# Altium PCB PWR board_PCB.PcbDoc
Units mm, origin at the board's own origin, x right, y up, seen from the top; angles counter-clockwise.
Board outline 85 x 70 mm, 2 copper layers (Top Layer, Bottom Layer); 51 components, 37 nets, 139 pads, 35 vias.
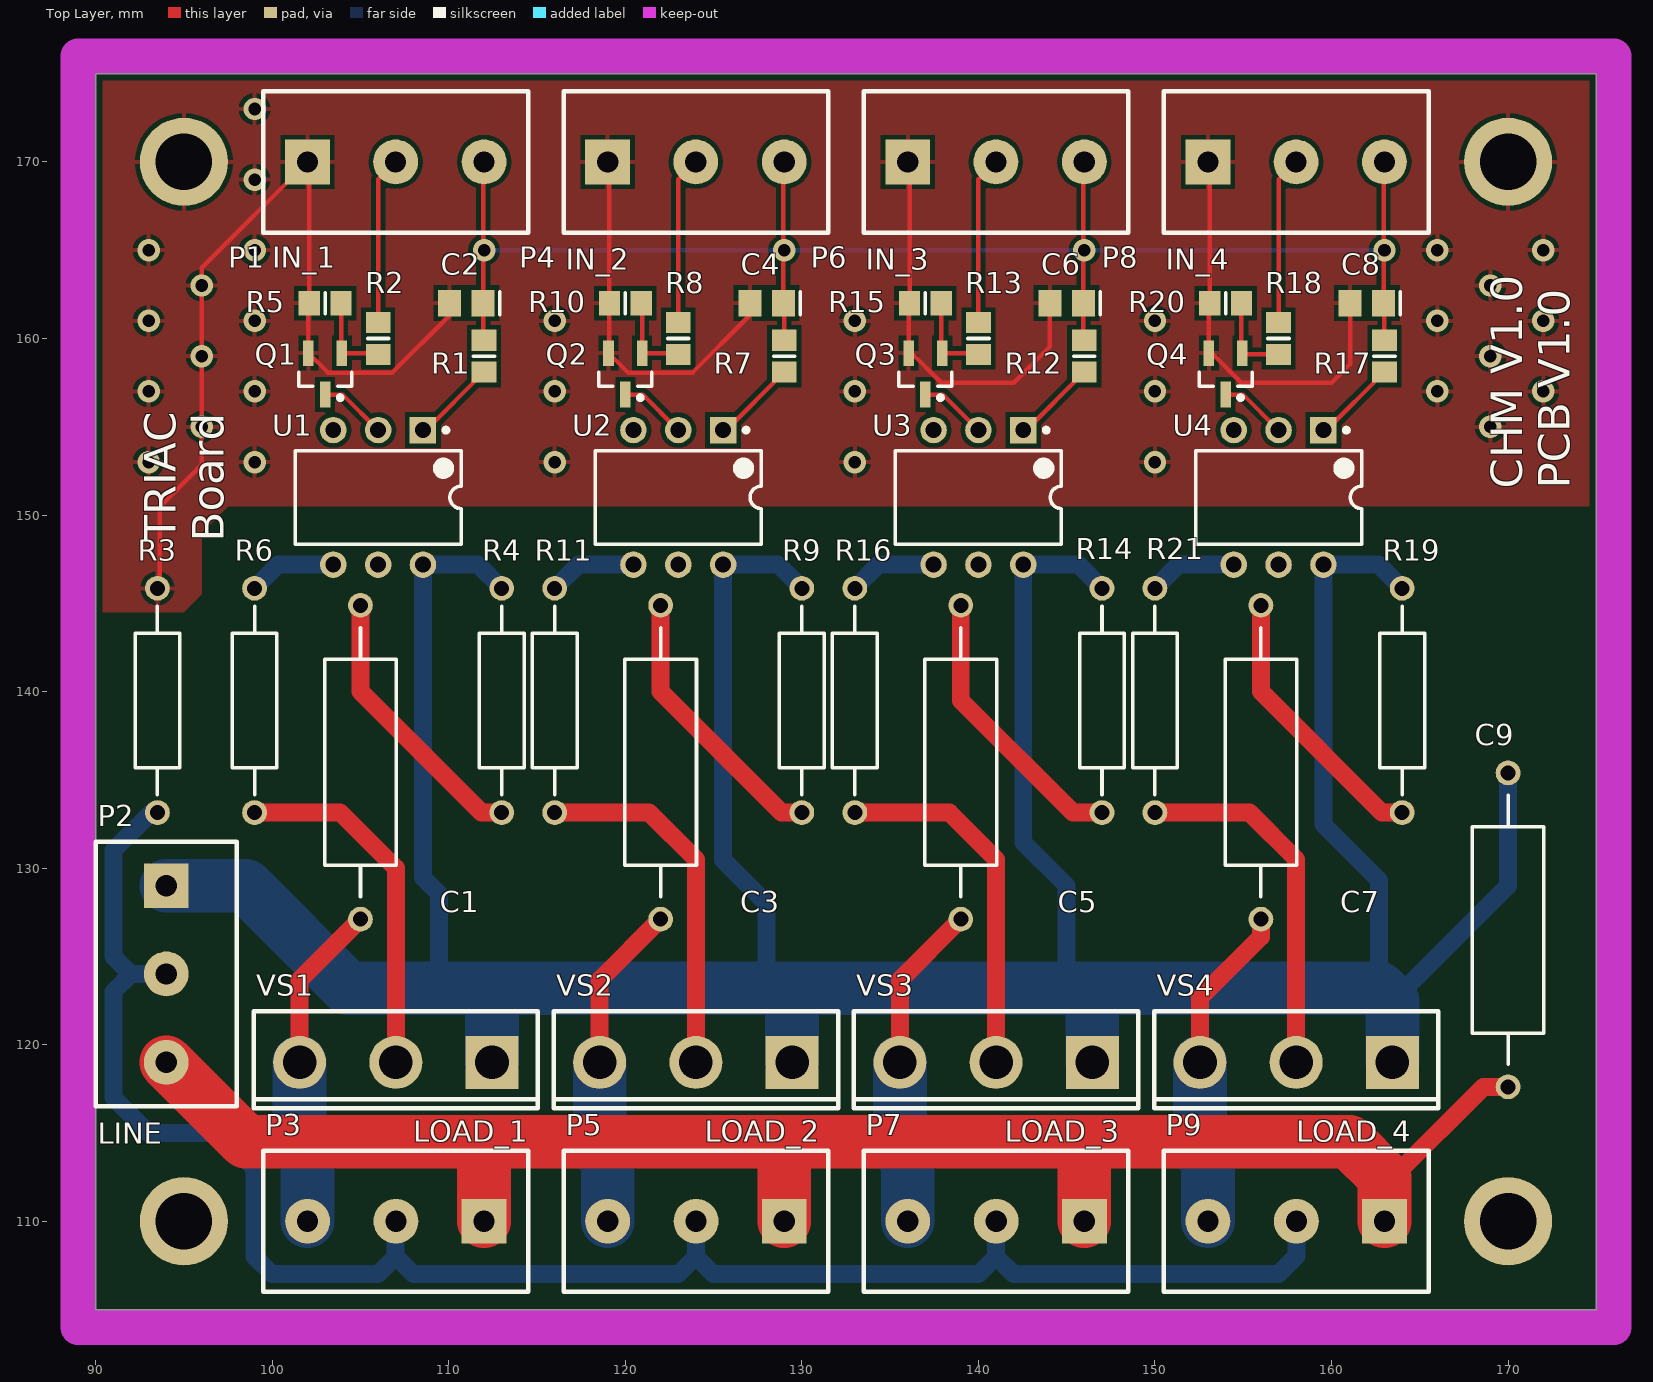
[diagram p0: Top Layer view]
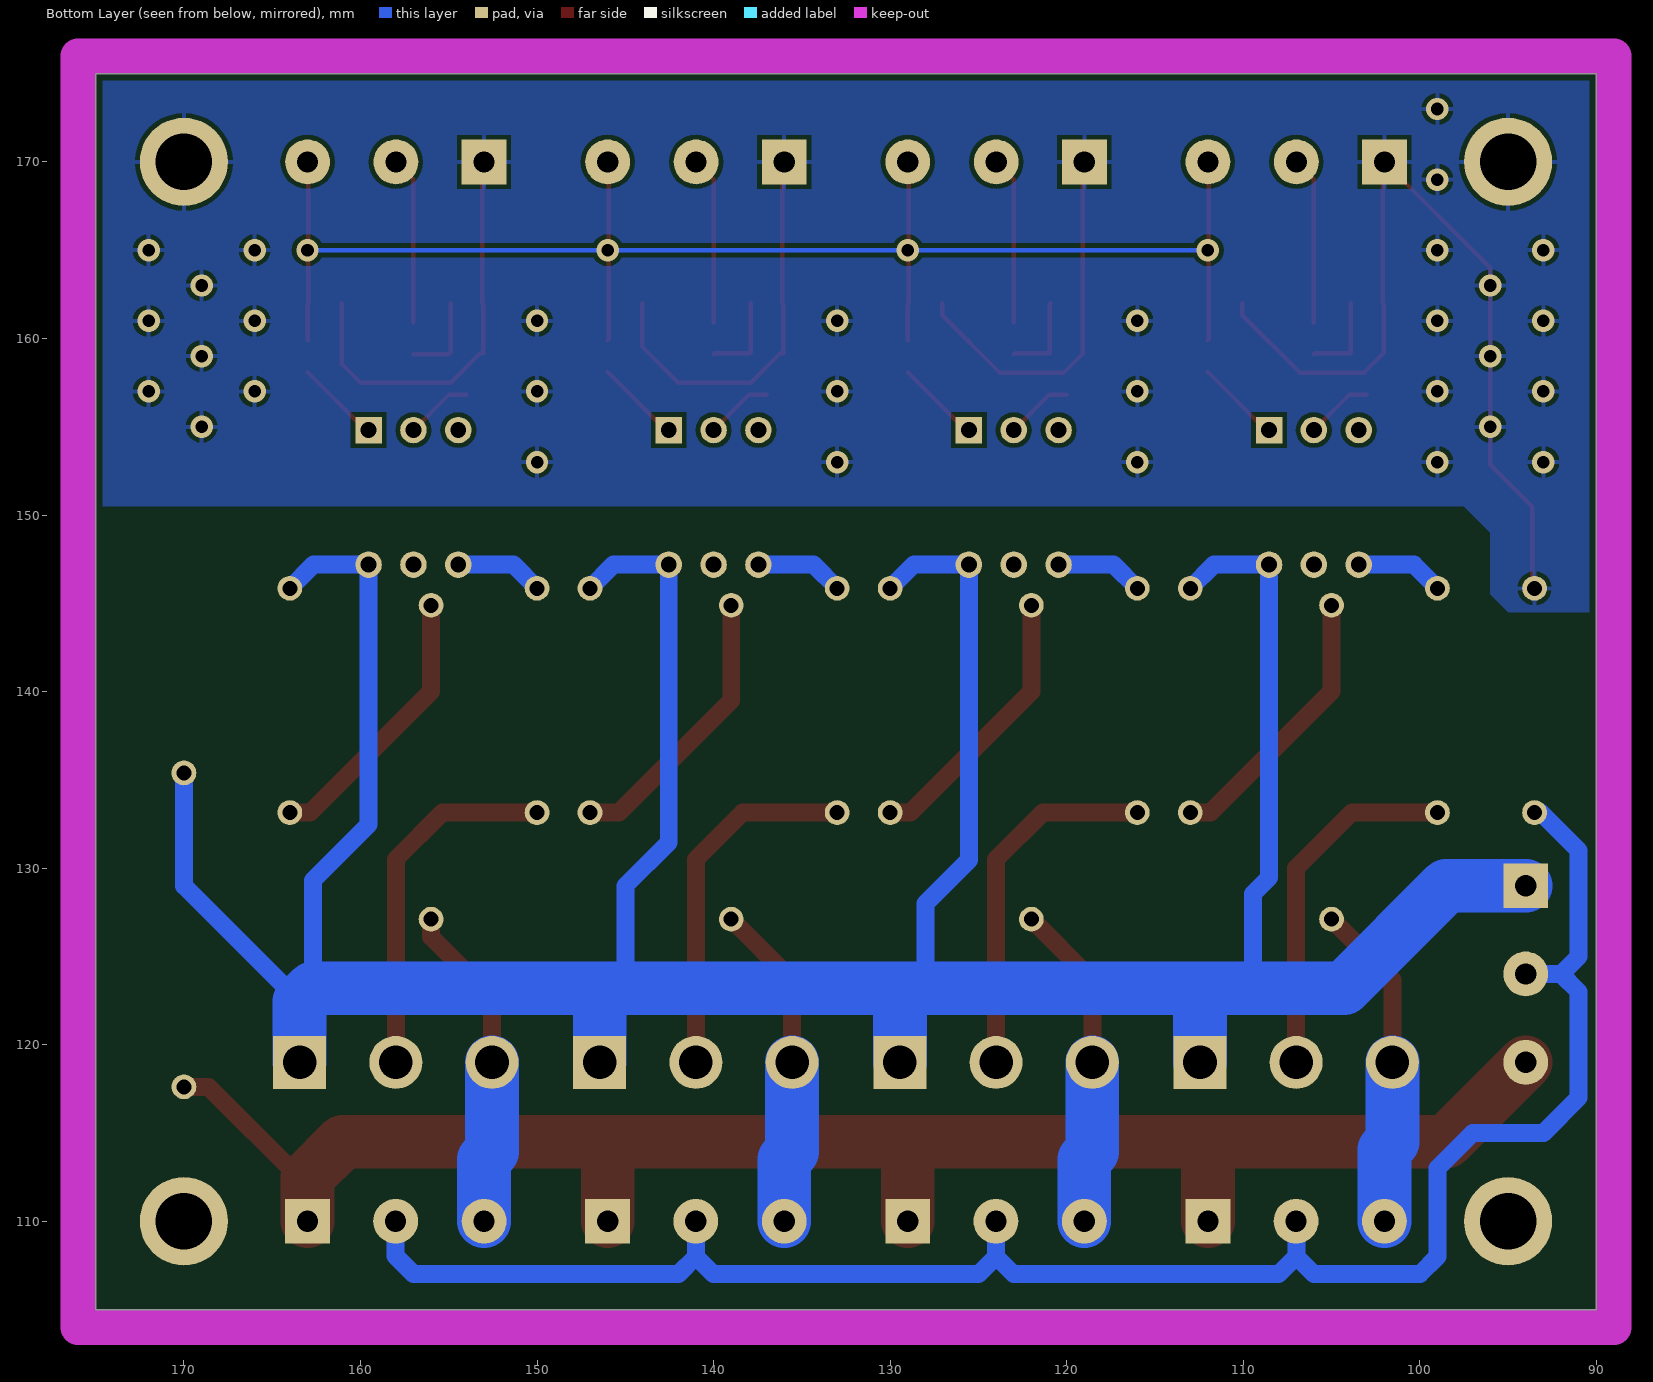
[diagram p1: Bottom Layer view, seen from below]

## Layer stack, top to bottom
Top Solder: solder mask 0.0102, Solder Resist, Dk 3.5
Top Layer: signal copper 0.0356
Dielectric1: dielectric 0.32, FR-4, Dk 4.8
Bottom Layer: signal copper 0.0356
Bottom Solder: solder mask 0.0102, Solder Resist, Dk 3.5

## Board outline
90,105 175,105 175,175 90,175

## Design rules (kind name [scope] priority, off if disabled: settings)
Clearance [All] p1: gap=0.254
PolygonConnect [All] p1: connectstyle=Relief reliefconductorwidth=0.254 reliefentries=4 polygonreliefangle="90 Angle" airgapwidth=0.254
RoutingVias [All] p1: holewidth=0.711 width=1.27 viastyle="Through Hole" minholewidth=0.711 minwidth=1.27 maxholewidth=0.711 maxwidth=1.27
SilkToSolderMaskClearance SilkscreenOverComponentPads [IsPad] p1: minsilkscreentomaskgap=0.254 clearancetoexposedcopper=TRUE
SolderMaskExpansion [All] p1: expansion=0.102
Width "Schematic Width Constraint_18" [InNet('NetC1_1')] p1: maxlimit=5.08 minlimit=1.016 preferedwidth=3.048 minimp=50.000000 maximp=50.000000 favimp=50.000000
Width "Schematic Width Constraint_16" [InNet('NetC3_1')] p2: maxlimit=5.08 minlimit=1.016 preferedwidth=3.048 minimp=50.000000 maximp=50.000000 favimp=50.000000
Width "Schematic Width Constraint_14" [InNet('NetC5_1')] p3: maxlimit=5.08 minlimit=1.016 preferedwidth=3.048 minimp=50.000000 maximp=50.000000 favimp=50.000000
Width "Schematic Width Constraint_12" [InNet('NetC7_1')] p4: maxlimit=5.08 minlimit=1.016 preferedwidth=3.048 minimp=50.000000 maximp=50.000000 favimp=50.000000
Width "Schematic Width Constraint_1" [InNet('AC_2')] p5: maxlimit=5.08 minlimit=1.016 preferedwidth=3.048 minimp=50.000000 maximp=50.000000 favimp=50.000000
Width "Schematic Width Constraint" [InNet('AC_1')] p6: maxlimit=5.08 minlimit=1.016 preferedwidth=3.048 minimp=50.000000 maximp=50.000000 favimp=50.000000
Width "Schematic Width Constraint_15" [InNet('NetC3_2')] p7: maxlimit=1.27 minlimit=0.254 preferedwidth=1.016 bottomlayer_maxwidth=1.016 minimp=50.000000 maximp=50.000000 favimp=50.000000
Width "Schematic Width Constraint_13" [InNet('NetC5_2')] p8: maxlimit=1.27 minlimit=0.254 preferedwidth=1.016 bottomlayer_maxwidth=1.016 minimp=50.000000 maximp=50.000000 favimp=50.000000
Width "Schematic Width Constraint_11" [InNet('NetC7_2')] p9: maxlimit=1.27 minlimit=0.254 preferedwidth=1.016 bottomlayer_maxwidth=1.016 minimp=50.000000 maximp=50.000000 favimp=50.000000
Width "Schematic Width Constraint_8" [InNet('NetR11_1')] p10: maxlimit=1.27 minlimit=0.254 preferedwidth=1.016 bottomlayer_maxwidth=1.016 minimp=50.000000 maximp=50.000000 favimp=50.000000
Width "Schematic Width Constraint_7" [InNet('NetR11_2')] p11: maxlimit=1.27 minlimit=0.254 preferedwidth=1.016 bottomlayer_maxwidth=1.016 minimp=50.000000 maximp=50.000000 favimp=50.000000
Width "Schematic Width Constraint_6" [InNet('NetR16_1')] p12: maxlimit=1.27 minlimit=0.254 preferedwidth=1.016 bottomlayer_maxwidth=1.016 minimp=50.000000 maximp=50.000000 favimp=50.000000
Width "Schematic Width Constraint_5" [InNet('NetR16_2')] p13: maxlimit=1.27 minlimit=0.254 preferedwidth=1.016 bottomlayer_maxwidth=1.016 minimp=50.000000 maximp=50.000000 favimp=50.000000
Width "Schematic Width Constraint_4" [InNet('NetR21_1')] p14: maxlimit=1.27 minlimit=0.254 preferedwidth=1.016 bottomlayer_maxwidth=1.016 minimp=50.000000 maximp=50.000000 favimp=50.000000
Width "Schematic Width Constraint_3" [InNet('NetR21_2')] p15: maxlimit=1.27 minlimit=0.254 preferedwidth=1.016 bottomlayer_maxwidth=1.016 minimp=50.000000 maximp=50.000000 favimp=50.000000
Width "Schematic Width Constraint_17" [InNet('NetC1_2')] p16: maxlimit=1.27 minlimit=0.254 preferedwidth=1.016 bottomlayer_maxwidth=1.016 minimp=50.000000 maximp=50.000000 favimp=50.000000
Width "Schematic Width Constraint_10" [InNet('NetR6_1')] p17: maxlimit=1.27 minlimit=0.254 preferedwidth=1.016 bottomlayer_maxwidth=1.016 minimp=50.000000 maximp=50.000000 favimp=50.000000
Width "Schematic Width Constraint_9" [InNet('NetR6_2')] p18: maxlimit=1.27 minlimit=0.254 preferedwidth=1.016 bottomlayer_maxwidth=1.016 minimp=50.000000 maximp=50.000000 favimp=50.000000
Width "Schematic Width Constraint_2" [InNet('GND_L')] p19: maxlimit=1.27 minlimit=0.254 preferedwidth=1.016 bottomlayer_maxwidth=1.016 minimp=50.000000 maximp=50.000000 favimp=50.000000
Width [All] p20: maxlimit=0.254 minlimit=0.254 preferedwidth=0.254
29 further rules are at their usual default settings.

## Components (designator, comment, footprint, x,y, rotation, side; value= is the part's Value field where it differs from the comment)
C1 "100nF" AXIAL-0.7 105,136 r90 top
C2 "C0805" 0805 111,162 r180 top
C3 "100nF" AXIAL-0.7 122,136 r90 top
C4 "C0805" 0805 128,162 r180 top
C5 "100nF" AXIAL-0.7 139,136 r90 top
C6 "C0805" 0805 145,162 r180 top
C7 "100nF" AXIAL-0.7 156,136 r90 top
C8 "C0805" 0805 162,162 r180 top
C9 "RDQL0320400V" AXIAL-0.7 170,126.5 r90 top
P1 "IN_1" DG390-5.0-03P 102,170 r270 top
P2 "LINE" DG390-5.0-03P 94,129 r180 top
P3 "LOAD_1" DG390-5.0-03P 112,110 r90 top
P4 "IN_2" DG390-5.0-03P 119,170 r270 top
P5 "LOAD_2" DG390-5.0-03P 129,110 r90 top
P6 "IN_3" DG390-5.0-03P 136,170 r270 top
P7 "LOAD_3" DG390-5.0-03P 146,110 r90 top
P8 "IN_4" DG390-5.0-03P 153,170 r270 top
P9 "LOAD_4" DG390-5.0-03P 163,110 r90 top
Q1 "BC817" SOT23_M 103,158 r270 top
Q2 "BC817" SOT23_M 120,158 r270 top
Q3 "BC817" SOT23_M 137,158 r270 top
Q4 "BC817" SOT23_M 154,158 r270 top
R1 "Res2" 6-0805_N 112,159 r270 top
R2 "Res2" 6-0805_N 106,160 r90 top
R3 "Res Semi" AXIAL-0.5 93.5,139.5 r90 top
R4 "Res Semi" AXIAL-0.5 113,139.5 r90 top
R5 "Res2" 6-0805_N 103,162 r0 top
R6 "Res Semi" AXIAL-0.5 99,139.5 r90 top
R7 "Res2" 6-0805_N 129,159 r270 top
R8 "Res2" 6-0805_N 123,160 r90 top
R9 "Res Semi" AXIAL-0.5 130,139.5 r90 top
R10 "Res2" 6-0805_N 120,162 r0 top
R11 "Res Semi" AXIAL-0.5 116,139.5 r90 top
R12 "Res2" 6-0805_N 146,159 r270 top
R13 "Res2" 6-0805_N 140,160 r90 top
R14 "Res Semi" AXIAL-0.5 147,139.5 r90 top
R15 "Res2" 6-0805_N 137,162 r0 top
R16 "Res Semi" AXIAL-0.5 133,139.5 r90 top
R17 "Res2" 6-0805_N 163,159 r270 top
R18 "Res2" 6-0805_N 157,160 r90 top
R19 "Res Semi" AXIAL-0.5 164,139.5 r90 top
R20 "Res2" 6-0805_N 154,162 r0 top
R21 "Res Semi" AXIAL-0.5 150,139.5 r90 top
U1 "MOC3051" DIP-6 106,151 r270 top
U2 "MOC3051" DIP-6 123,151 r270 top
U3 "MOC3051" DIP-6 140,151 r270 top
U4 "MOC3051" DIP-6 157,151 r270 top
VS1 "SCR" Super-TO-247AC 107,119 r180 top
VS2 "SCR" Super-TO-247AC 124,119 r180 top
VS3 "SCR" Super-TO-247AC 141,119 r180 top
VS4 "SCR" Super-TO-247AC 158,119 r180 top

## Footprints (in the part's own frame and the unit in brackets; to place one, negate y for a bottom-side part, rotate by r counter-clockwise, add the part's x,y. Pads: shape width x height; smd on the part's side, far side on the other; paste and mask are expansions set on the pad)
6-0805_N [mm] "Chip Resistor, Body 2.0x1.2mm, IPC Medium Density"
  rect 1.2x1.4 smd: 1(-0.9,0) 2(0.9,0)
  silkscreen extent 0,-0.6 0,0.6, body extent -1.07,-0.7 1.07,0.7, height 0.7
0805 [mm] "Chip Capacitor; Body 2.0 x 1.2 mm (LxW typ)"
  rect 1.3x1.5 smd: 1(-0.95,0) 2(0.95,0)
  silkscreen extent -1.9,-0.65 -1.9,0.65
AXIAL-0.5 [mm] "Axial Device, Thru-Hole; 2 Leads; 0.5 in Pin Spacing"
  round 1.4 hole 0.85: 1(-6.35,0) 2(6.35,0)
  silkscreen extent -5.33,-1.27 5.33,1.27
AXIAL-0.7 [mm] "Axial Device, Thru-Hole; 2 Leads; 0.7 in Pin Spacing"
  round 1.4 hole 0.85: 1(-8.89,0) 2(8.89,0)
  silkscreen extent -7.62,-2.03 7.62,2.03
DG390-5.0-03P [mm]
  rect 2.54x2.54 hole 1.2: 1(0,0)
  round 2.54 hole 1.2: 2(0,4.992) 3(0,10)
  silkscreen extent -4,-2.5 4,12.5
DIP-6 [mm] "DIP; 6 Leads; Row Spacing 7.62 mm; Pitch 2.54 mm"
  rect 1.5x1.5 hole 0.9: 1(-3.81,2.54)
  round 1.5 hole 0.9: 2(-3.81,0) 3(-3.81,-2.54) 4(3.81,-2.54) 5(3.81,0) 6(3.81,2.54)
  silkscreen extent -3.93,-4.7 2.65,4.7, body extent -3.55,-4.7 3.55,4.7, height 5.46
SOT23_M [mm] "SOT23, 3-Leads, Body 2.9x1.3mm, Pitch 0.95mm, Lead Span 2.3mm - Reverse Pinning, IPC Low Density"
  rect 1.45x0.6 smd: 1(1.175,0) 2(-1.175,-0.95) 3(-1.175,0.95)
  silkscreen extent -0.1,-1.5 1.47,1.5, body extent -0.7,-1.5 0.7,1.5, height 1.1
Super-TO-247AC [mm] "SIP; 3 Leads; Body 20.3 x 15.6 x 5 mm (typ); Pitch 5.45 mm"
  rect 3x3 hole 1.9: 1(-5.45,0)
  round 3 hole 1.9: 2(0,0) 3(5.45,0)
  silkscreen extent -8.05,-2.9 8.05,2.6

## Part data
C1 C3 C5 C7: library part HFZ222MBFEJ0K, "Ceramic High Voltage Disc Capacitor, Class 2: 2200pF 6kV K 2000"
C2 C4 C6 C8: "Ceramic Chip Capacitor - Standard"
C9: "Ceramic Singlelayer Tubular Capacitor: 400V with Controlled Short-term Stability (KzK), 20mm tube length"
P1 P2 P3 P4 P5 P6 P7 P8 P9: library part "Header 3", "Header, 3-Pin"
Q1 Q2 Q3 Q4: library part QNPN, "NPN Bipolar Transistor"
R1 R2 R5 R7 R8 R10 R12 R13 R15 R17 R18 R20: "Resistor"
R3 R4 R6 R9 R11 R14 R16 R19 R21: "Semiconductor Resistor"
U1 U2 U3 U4: library part "SW DIP-3", "DIP Switch, 3 Position, SPST"
VS1 VS2 VS3 VS4: "Silicon Controlled Rectifier"

## Free pads (board coordinates)
  round 5 hole 3.2: mh(95,110) mh(95,170) mh(170,110) mh(170,170)

## Via types
v1: diameter 1.27, hole 0.711, Top Layer to Bottom Layer, 35 vias

## Nets (pads, with @x,y where several pads share a name; then routed paths per layer and width w, separated by ;. In a path a pad name is that pad's centre, name@x,y a point inside that pad or via, vN(x,y) a via of type N, cw(c..) or ccw(c..) an arc to the next point about the centre after c; other vN are vias at no path point)
AC_1: C9.2 P2.1 R4.2 R9.2 R14.2 R19.2 U1.6 U2.6 U3.6 U4.6 VS1.1 VS2.1 VS3.1 VS4.1 | length 223.3
  Bottom Layer w1.016: 109.45,123.8 109.45,128.55 108.54,129.46 U1.6 111.66,147.19 R4.2 ; 128,123.25 128,128 125.54,130.46 U2.6 128.66,147.19 R9.2 ; 145,123.25 145,129 142.54,131.46 U3.6 145.66,147.19 R14.2 ; R19.2 162.66,147.19 U4.6 159.54,132.46 162.7,129.3 162.7,123.2 164.2,123.2 170,129 C9.2
  Bottom Layer w3.048: P2.1 98.5,129 104.3,123.2 112.45,123.2 ; VS1.1 112.45,123.2 ; VS2.1 129.45,123.2 ; VS3.1 146.45,123.2 ; VS4.1 163.45,122.45 162.7,123.2 146.45,123.2 ; 112.45,123.2 129.45,123.2 ; 129.45,123.2 146.45,123.2
AC_2: C9.1 P2.3 P3.1 P5.1 P7.1 P9.1 | length 96.8
  Top Layer w1.016: 163,112.5 163.5,112.5 168.61,117.61 C9.1
  Top Layer w3.048: P2.3 98.5,114.5 112,114.5 ; P3.1 112,114.5 ; P5.1 129,114.5 ; P7.1 146,114.5 ; P9.1 163,112.5 161,114.5 146,114.5 ; 112,114.5 129,114.5 ; 129,114.5 146,114.5
GND: C2.2 C4.2 C6.2 C8.2 P1.1 P4.1 P6.1 P8.1 pad.mh@95,170 pad.mh@170,170 Q1.2 Q2.2 Q3.2 Q4.2 R3.2 R5.1 R10.1 R15.1 R20.1 | length 116.7
  Top Layer w0.254: R3.2 93.627,145.977 93.627,150.477 96,152.85 96,164 P1.1 102.1,169.9 R5.1 ; R5.1@102.05,161.95 Q1.2 103.156,158.069 106.808,158.069 110.05,161.311 C2.2 ; P4.1 119.1,169.9 R10.1 119.1,159.225 Q2.2 120.156,158.069 123.808,158.069 127.05,161.311 C4.2 ; P6.1 136.1,169.9 R15.1 136.05,161.95 Q3.2 136.214,159.175 137.889,157.5 142,157.5 144.05,159.55 C6.2 ; P8.1 153.1,169.9 R20.1 153.05,161.95 Q4.2 153.214,159.175 154.889,157.5 160,157.5 161.05,158.55 C8.2
  other v1: 93,153 99,153 116,153 133,153 150,153 96,155 169,155 93,157 99,157 116,157 133,157 150,157 166,157 172,157 96,159 169,159 93,161 99,161 116,161 133,161 150,161 166,161 172,161 96,163 169,163 93,165 99,165 166,165 172,165 99,169 99,173
GND_L: P2.2 P3.2 P5.2 P7.2 P9.2 R3.1 | length 105.2
  Bottom Layer w1.016: R3.1 93.15,133.15 91,131 91,125 91.992,124.008 92.008,124.008 ; P2.2 92.008,124.008 ; 107.008,107.992 108,107 123,107 123.992,107.992 ; P3.2 106.992,109.984 106.992,107.992 106,107 100,107 99,108 99,113 97,115 93,115 91,117 91,123 92.008,124.008 ; P5.2 124.008,107.992 125,107 140,107 140.992,107.992 140.992,109.984 P7.2 ; 141.008,107.992 141.992,107.008 156.992,107.008 158.008,108.024 P9.2
NetC1_1: C1.1 P3.3 VS1.3 | length 18.7
  Top Layer w1.016: VS1.3 101.55,123.66 C1.1
  Bottom Layer w3.048: VS1.3 101.55,114.5 102,114.05 P3.3
NetC1_2: C1.2 R4.1 | length 15.7
  Top Layer w1.016: C1.2 105,140 111.85,133.15 R4.1
NetC3_1: C3.1 P5.3 VS2.3 | length 18.7
  Top Layer w1.016: VS2.3 118.55,123.66 C3.1
  Bottom Layer w3.048: VS2.3 118.55,113.95 119,113.5 P5.3
NetC3_2: C3.2 R9.1 | length 15.7
  Top Layer w1.016: C3.2 122,140 128.85,133.15 R9.1
NetC5_1: C5.1 P7.3 VS3.3 | length 18.7
  Top Layer w1.016: VS3.3 135.55,123.66 C5.1
  Bottom Layer w3.048: VS3.3 135.55,113.95 136,113.5 P7.3
NetC5_2: C5.2 R14.1 | length 16
  Top Layer w1.016: C5.2 139,139.5 145.35,133.15 R14.1
NetC7_1: C7.1 P9.3 VS4.3 | length 18.7
  Top Layer w1.016: VS4.3 152.55,122.66 156,126.11 C7.1
  Bottom Layer w3.048: VS4.3 152.55,113.95 153,113.5 P9.3
NetC7_2: C7.2 R19.1 | length 15.7
  Top Layer w1.016: C7.2 156,140 162.85,133.15 R19.1
NetQ1_1: Q1.1 U1.2 | length 3.8
  Top Layer w0.254: Q1.1 103.985,156.825 U1.2
NetQ1_2: Q1.3 R2.1 R5.2 | length 4.9
  Top Layer w0.254: R5.2 103.9,159.225 Q1.3 105.925,159.175 R2.1
NetQ2_1: Q2.1 U2.2 | length 3.8
  Top Layer w0.254: Q2.1 120.985,156.825 U2.2
NetQ2_2: Q2.3 R8.1 R10.2 | length 4.9
  Top Layer w0.254: R10.2 120.95,161.95 Q2.3 122.925,159.175 R8.1
NetQ3_1: Q3.1 U3.2 | length 3.8
  Top Layer w0.254: Q3.1 137.985,156.825 U3.2
NetQ3_2: Q3.3 R13.1 R15.2 | length 4.9
  Top Layer w0.254: R15.2 137.9,159.225 Q3.3 139.925,159.175 R13.1
NetQ4_1: Q4.1 U4.2 | length 3.8
  Top Layer w0.254: Q4.1 154.985,156.825 U4.2
NetQ4_2: Q4.3 R18.1 R20.2 | length 4.9
  Top Layer w0.254: R20.2 154.9,159.225 Q4.3 155.025,159.1 R18.1
NetR1_2: R1.2 U1.1 | length 4.8
  Top Layer w0.254: U1.1 108.71,154.81 R1.2
NetR6_1: R6.1 VS1.2 | length 20.3
  Top Layer w1.016: R6.1 103.85,133.15 107,130 VS1.2
NetR6_2: R6.2 U1.4 | length 5
  Bottom Layer w1.016: R6.2 100.34,147.19 U1.4
NetR7_2: R7.2 U2.1 | length 4.8
  Top Layer w0.254: U2.1 125.71,154.81 R7.2
NetR11_1: R11.1 VS2.2 | length 20.6
  Top Layer w1.016: R11.1 121.35,133.15 124,130.5 VS2.2
NetR11_2: R11.2 U2.4 | length 5
  Bottom Layer w1.016: R11.2 117.34,147.19 U2.4
NetR12_2: R12.2 U3.1 | length 4.8
  Top Layer w0.254: U3.1 142.71,154.81 R12.2
NetR16_1: R16.1 VS3.2 | length 20.6
  Top Layer w1.016: R16.1 138.35,133.15 141,130.5 VS3.2
NetR16_2: R16.2 U3.4 | length 5
  Bottom Layer w1.016: R16.2 134.34,147.19 U3.4
NetR17_2: R17.2 U4.1 | length 4.8
  Top Layer w0.254: U4.1 159.71,154.81 R17.2
NetR21_1: R21.1 VS4.2 | length 20.6
  Top Layer w1.016: R21.1 155.35,133.15 158,130.5 VS4.2
NetR21_2: R21.2 U4.4 | length 5
  Bottom Layer w1.016: R21.2 151.34,147.19 U4.4
ON_1: P1.2 R2.2 | length 9.5
  Top Layer w0.254: R2.2 106,169.008 P1.2
ON_2: P4.2 R8.2 | length 9.5
  Top Layer w0.254: R8.2 123,169.008 P4.2
ON_3: P6.2 R13.2 | length 9.5
  Top Layer w0.254: R13.2 140,169.008 P6.2
ON_4: P8.2 R18.2 | length 9.5
  Top Layer w0.254: R18.2 157,169.008 P8.2
VCC: C2.1 C4.1 C6.1 C8.1 P1.3 P4.3 P6.3 P8.3 R1.1 R7.1 R12.1 R17.1 | length 91.6
  Top Layer w0.254: R1.1 111.95,159.95 C2.1 111.95,169.95 P1.3 ; R7.1 129,161.95 C4.1 128.95,169.95 P4.3 ; R12.1 145.95,159.95 C6.1 145.95,169.95 P6.3 ; R17.1 163,161.95 C8.1 162.95,169.95 P8.3
  Bottom Layer w0.254: v1(112,165) v1(129,165) v1(146,165) v1(163,165)
pads on no net: U1.3 U1.5 U2.3 U2.5 U3.3 U3.5 U4.3 U4.5

## Polygon pours and split planes (outlines as drawn)
GND on Top Layer "Top Layer-No Net" (solid, pour order 0): 90,175 90,144.5 95,144.5 96,145.5 96,149 97.5,150.5 98.5,150.5 117.5,150.5 175,150.5 175,175
GND on Bottom Layer "Top Layer-No Net" (solid, pour order 4): 90,175 90,144.5 95,144.5 96,145.5 96,149 97.5,150.5 98.5,150.5 117.5,150.5 175,150.5 175,175

## Keep-outs
Keep-Out Layer:
  lines w2: 89,104 89,176 176,176 176,104 89,104

## Silkscreen, mask and mechanical layers (free items; w line width, h text height)
Top Overlay:
  text "CHM V1.0 / PCB V1.0" at 173.5,151.5 h1.8 r90
  text "TRIAC / Board" at 97.25,148.5 h1.8 r90